# Altium PCB PCB1.PcbDoc
Units mm, origin at the board's own origin, x right, y up, seen from the top; angles counter-clockwise.
Board outline 46.8 x 37.5 mm, 2 copper layers (Top Layer, Bottom Layer), stack 1.671 mm thick; 34 components, 12 nets, 75 pads, 42 vias.
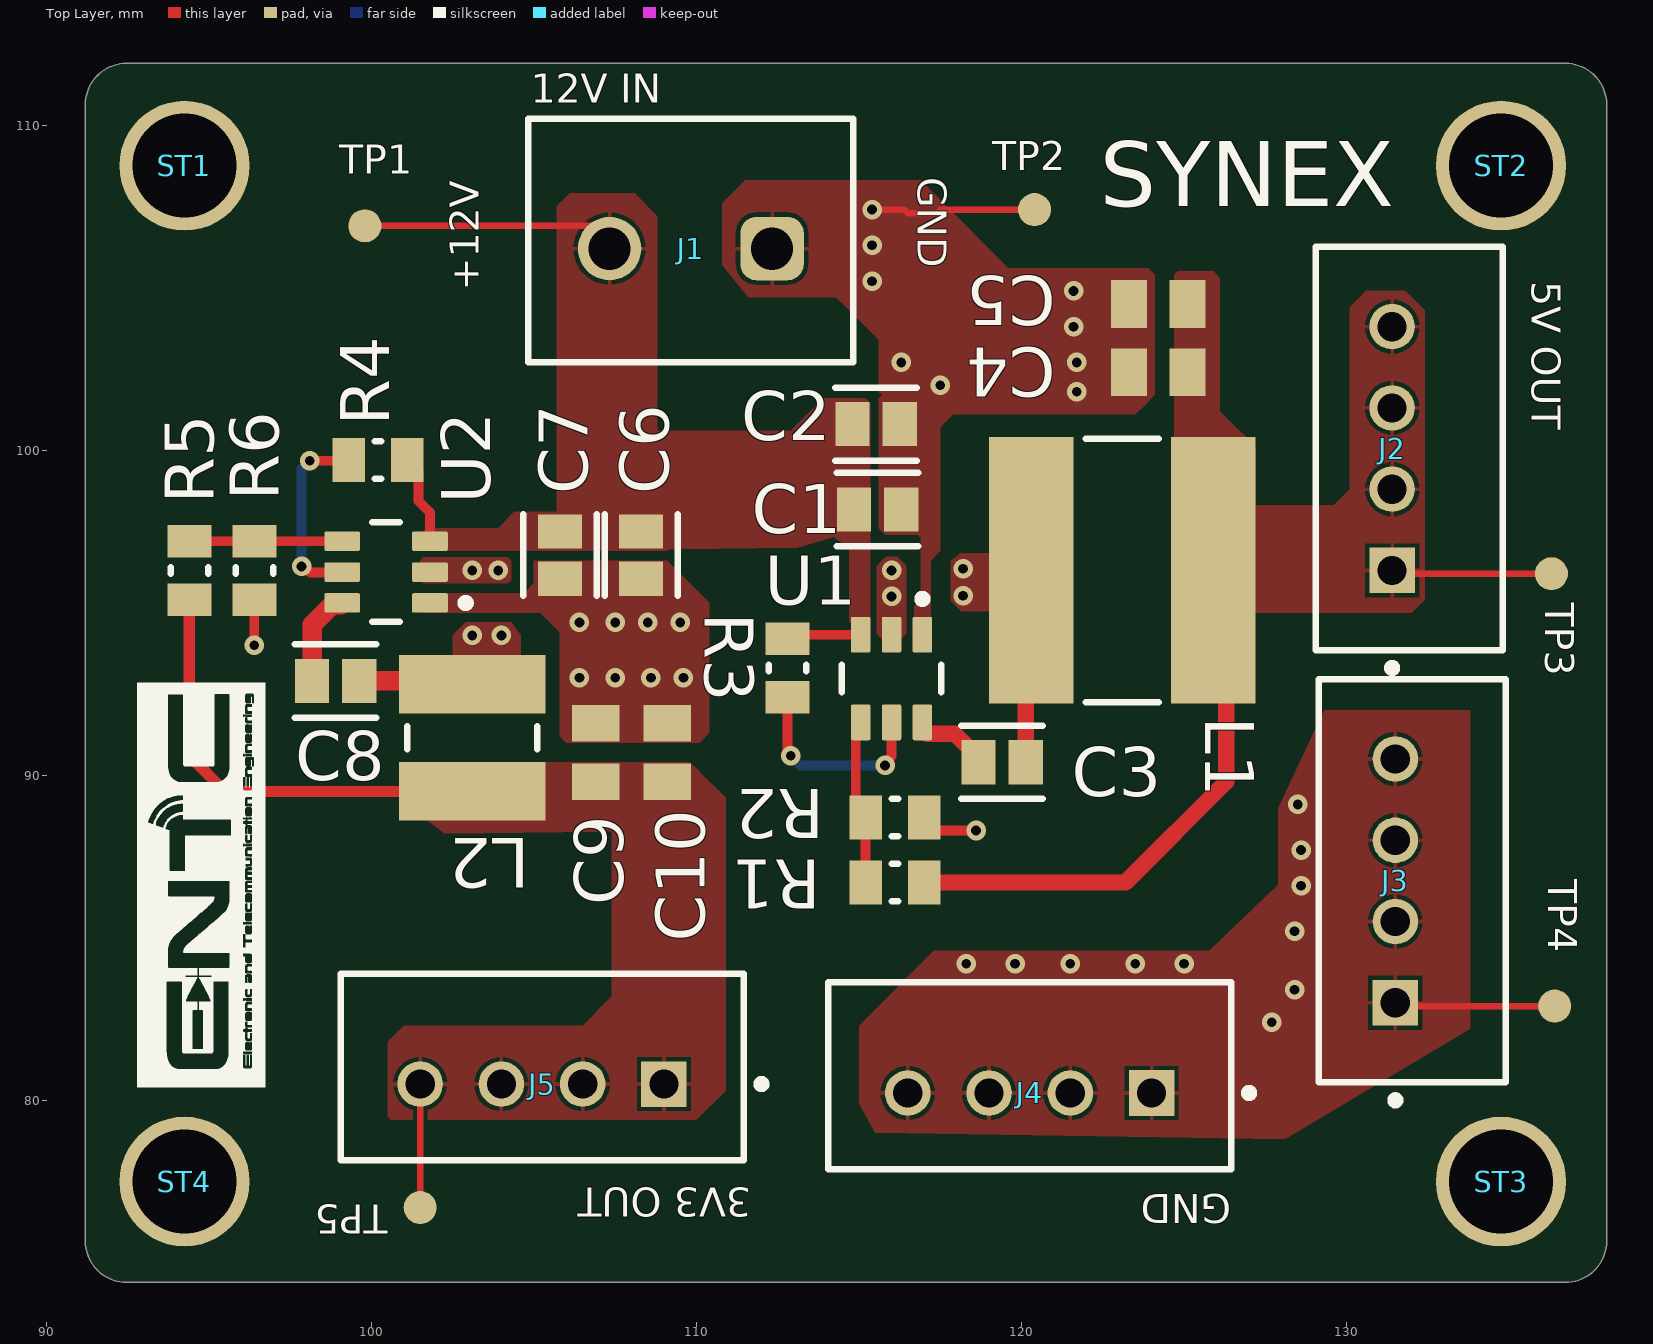
[diagram p0: Top Layer view]
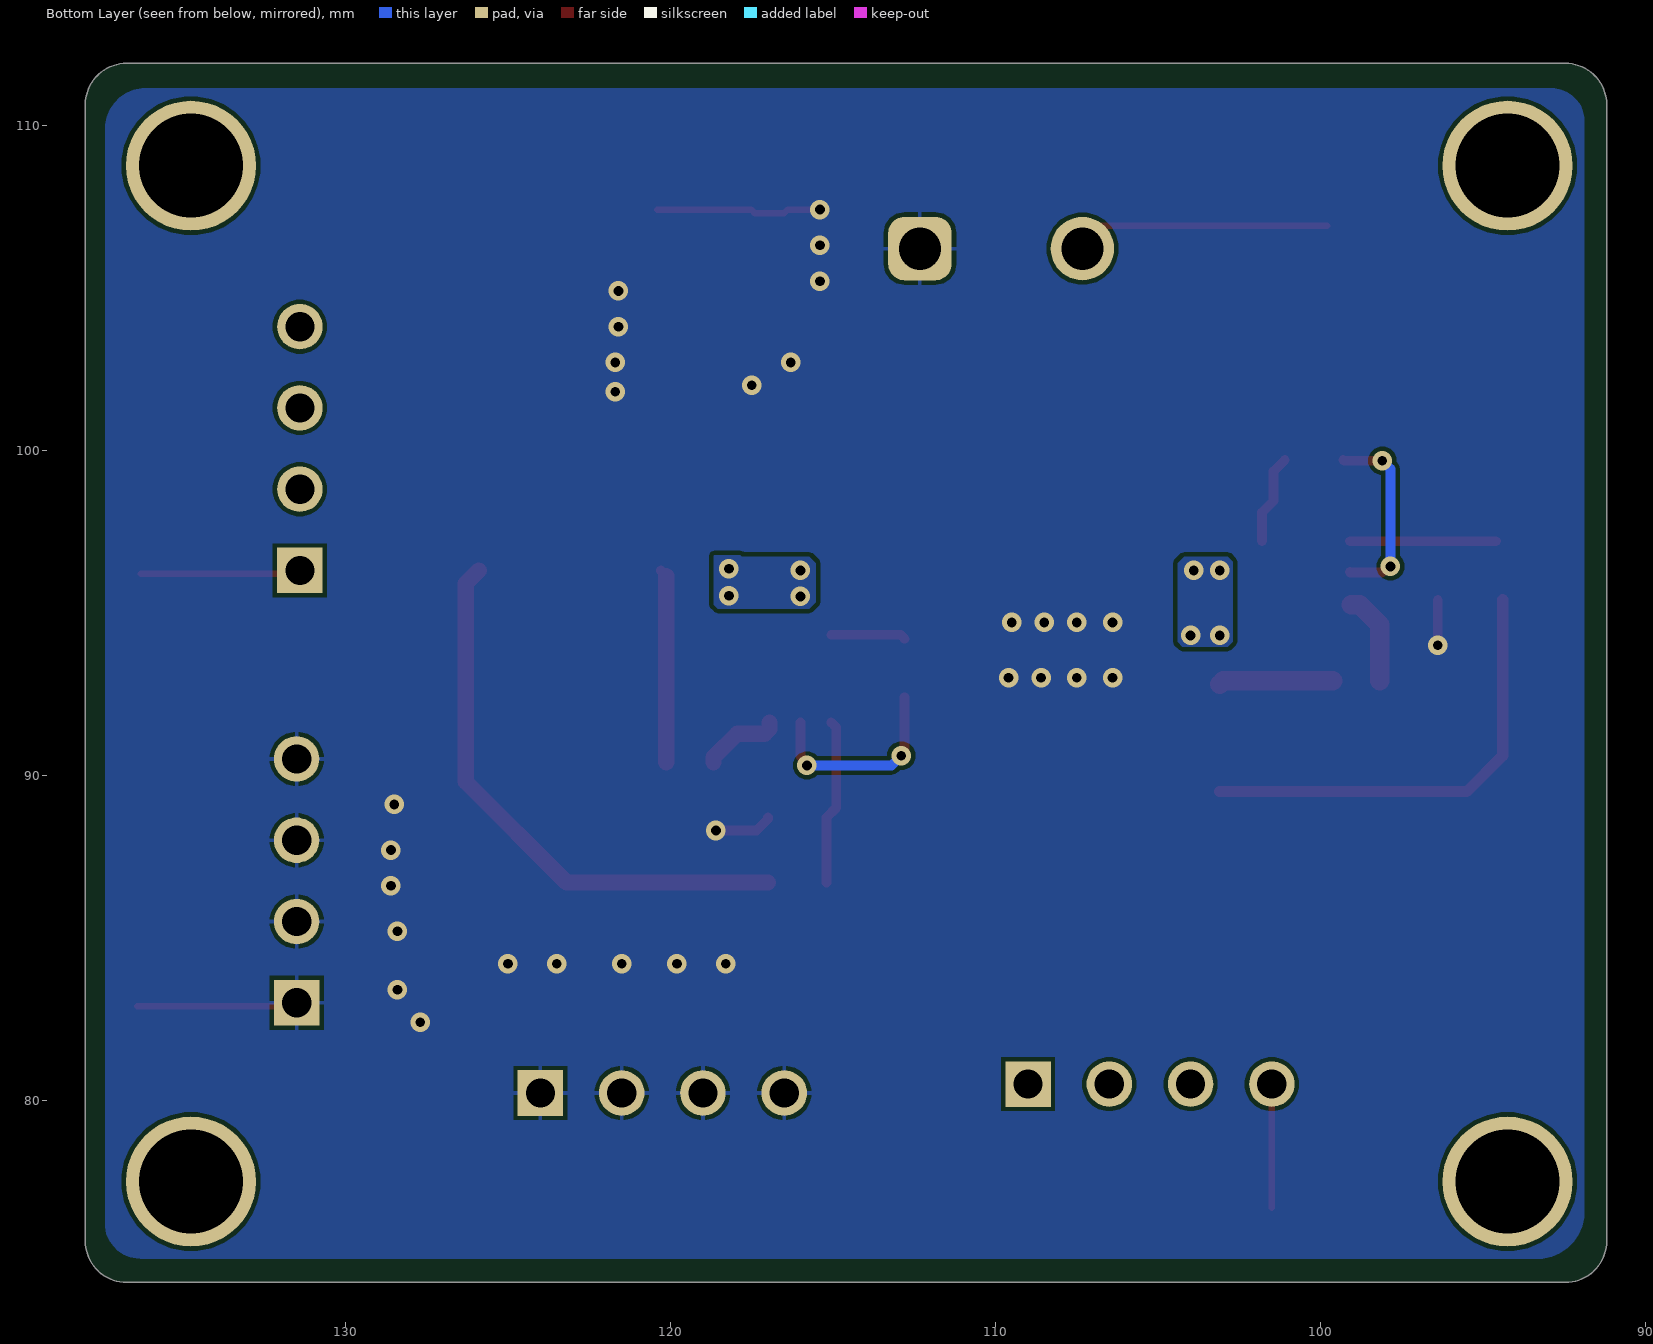
[diagram p1: Bottom Layer view, seen from below]
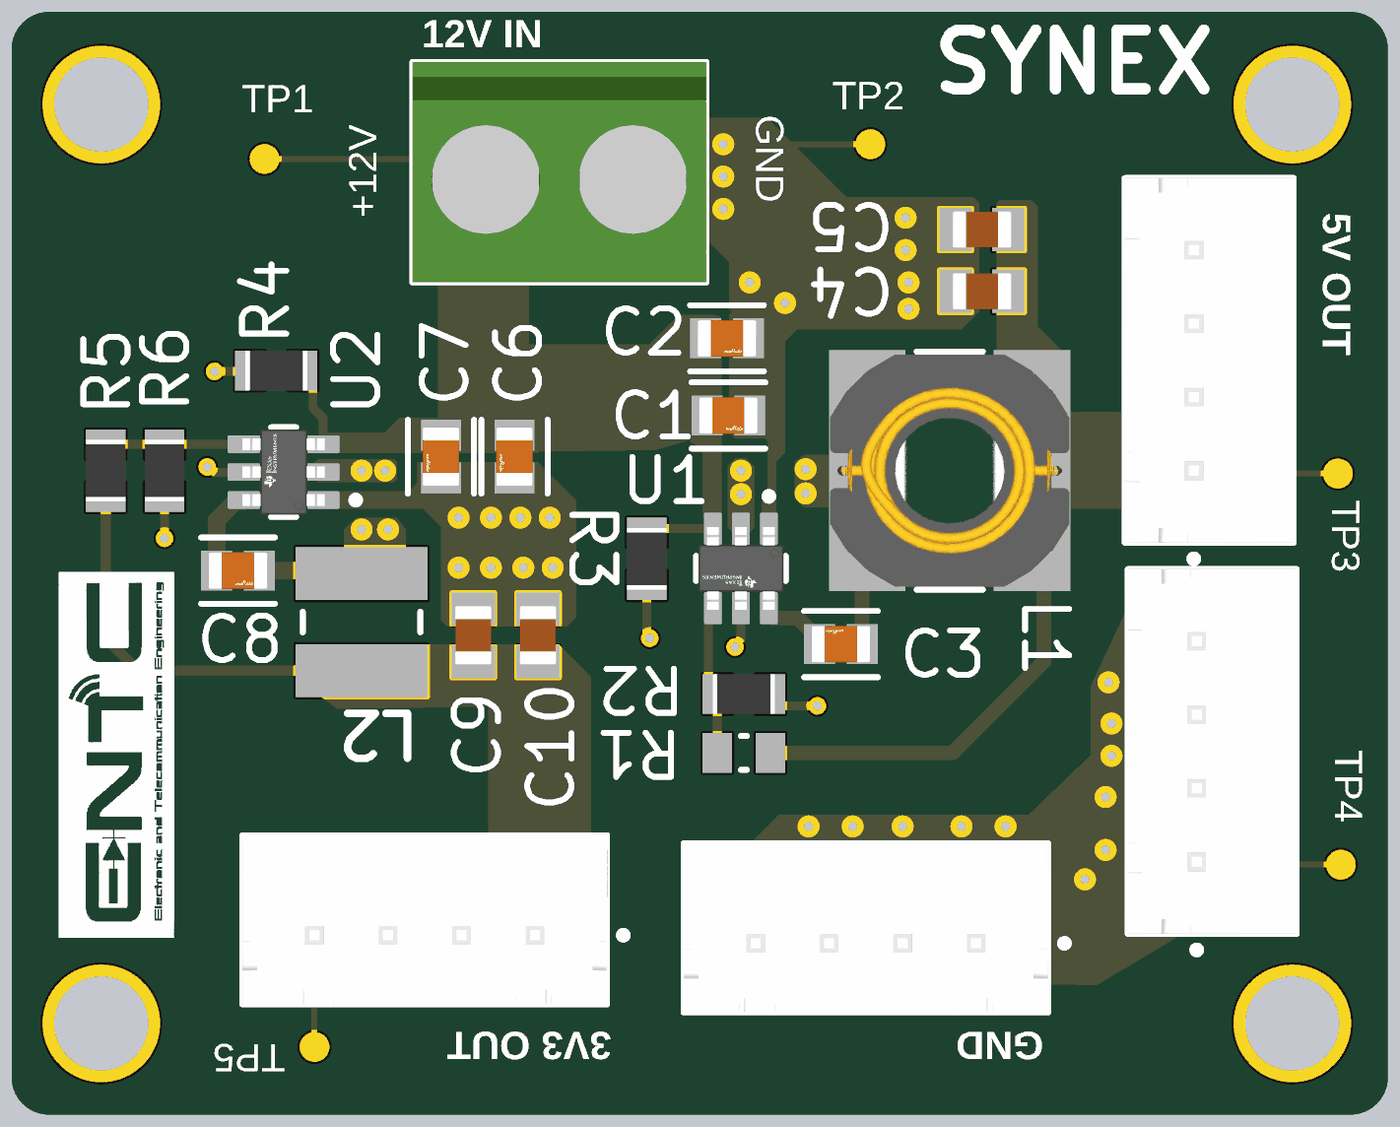
[diagram p2: 3D render of the assembled board from above, using the file's embedded part models]

## Layer stack, top to bottom
Top Solder: solder mask 0.0102, Solder Resist, Dk 3.5
Top Layer: signal copper 0.0356
Dielectric 1: dielectric 1.6, FR-4, Dk 4.8
Bottom Layer: signal copper 0.0356
Bottom Solder: solder mask 0.0102, Solder Resist, Dk 3.5

## Board outline
91.2,75.67 ccw(c92.47,75.67) 92.47,74.4 136.73,74.4 ccw(c136.73,75.67) 138,75.67 138,110.63 ccw(c136.73,110.63) 136.73,111.9 92.47,111.9 ccw(c92.47,110.63) 91.2,110.63

## Design rules (kind name [scope] priority, off if disabled: settings)
BoardOutlineClearance [All] p1: gap=0.2 ignorepadtopadclearanceinfootprint=FALSE
Clearance [All] p1: gap=0.127 ignorepadtopadclearanceinfootprint=FALSE except(0.25: Arc-Hole Track-Hole SMDPad-Hole THPad-Hole Via-Hole Fill-Hole Poly-Hole Region-Hole Text-Hole)
ComponentClearance [All] p1: gap=0.127 collisioncheckmode=3 verticalgap=0.127 showdistances=TRUE
DiffPairsRouting [All] p1: maxlimit=0.254 minlimit=0.127 mostfreqgap=0.127 toplayer_minwidth=0.127 toplayer_maxwidth=25.4 toplayer_prefwidth=0.127 bottomlayer_minwidth=0.127 bottomlayer_maxwidth=25.4 bottomlayer_prefwidth=0.127 maxuncoupledlength=12.7
Height [All] p1: minheight=0 maxheight=1816.048 prefheight=12.7
HoleSize [All] p1: absolutevalues=TRUE maxlimit=6.3 minlimit=0.3 maxpercent=80.000 minpercent=20.000
HoleToHoleClearance [All] p1: gap=0.25 allowstackedmicrovias=FALSE
MinimumAnnularRing [All] p1: minimumring=0.076
MinimumSolderMaskSliver [All] p1: minsoldermaskwidth=0
PlaneClearance [All] p1: clearance=0.127
PlaneConnect PlaneConnectPowerPads [InPadClass('PowerPads')] p1: planeconnectstyle=Direct reliefexpansion=0.508 reliefentries=4 reliefconductorwidth=0.254 reliefairgap=0.254
PlaneConnect [All] p2: pad.planeconnectstyle=Relief pad.reliefexpansion=0.3 pad.reliefentries=4 pad.reliefconductorwidth=0.127 pad.reliefairgap=0.127 via.planeconnectstyle=Direct via.reliefexpansion=0.3 via.reliefentries=4 via.reliefconductorwidth=0.127 via.reliefairgap=0.127
PolygonConnect PolygonConnectPowerPads [All vs (InPadClass('PowerPads'))] p1: connectstyle=Direct reliefconductorwidth=0.254 reliefentries=4 polygonreliefangle="90 Angle" airgapwidth=0.254
PolygonConnect [All] p2: thpad.connectstyle=Relief thpad.reliefconductorwidth=0.127 thpad.reliefentries=4 thpad.polygonreliefangle="90 Angle" thpad.airgapwidth=0.127 smdpad.connectstyle=Direct smdpad.reliefconductorwidth=0.127 smdpad.reliefentries=4 smdpad.polygonreliefangle="90 Angle" smdpad.airgapwidth=0.127 via.connectstyle=Direct via.reliefconductorwidth=0.127 via.reliefentries=4 via.polygonreliefangle="90 Angle" via.airgapwidth=0.127
RoutingVias [All] p1: holewidth=0.3 width=0.6 viastyle="Through Hole" minholewidth=0.3 minwidth=0.6 maxholewidth=0.6 maxwidth=6.6
SilkToSilkClearance [All] p1: silktosilkclearance=0
SilkToSolderMaskClearance [IsPad] p1: minsilkscreentomaskgap=0.127 clearancetoexposedcopper=TRUE
SolderMaskExpansion [All] p1: expansion=0.075 istentingtop=FALSE
SupplyNets "Schematic Supply Nets_1" [InNet('VIN_12V')] p1: voltage=0.000
SupplyNets "Schematic Supply Nets" [InNet('GND')] p2: voltage=0.000
Width [All] p1: maxlimit=25.4 minlimit=0.127 preferedwidth=0.127 minimp=50.000000 maximp=50.000000 favimp=50.000000
20 further rules are at their usual default settings.

## Components (designator, comment, footprint, x,y, rotation, side; value= is the part's Value field where it differs from the comment)
C1 "MSAST219LB5106KTNA01E44L" FP-GRM21B-0_2-e0_2_0_7-IPC_C 115.574,98.175 r0 top
C2 "MSAST219LB5106KTNA01E44L" FP-GRM21B-0_2-e0_2_0_7-IPC_C 115.526,100.8 r0 top
C3 "08053C104KAT2A" FP-GRM21B-0_2-e0_2_0_7-IPC_C 119.4,90.4 r180 top
C4 "GRM21BR61A226ME44L" CAPC2012X145N 124.2,102.4 r0 top value="22.0 uF"
C5 "GRM21BR61A226ME44L" CAPC2012X145N 124.2,104.5 r0 top value="22.0 uF"
C6 "MSAST219LB5106KTNA01E44L" FP-GRM21B-0_2-e0_2_0_7-IPC_C 108.3,96.774 r270 top
C7 "MSAST219LB5106KTNA01E44L" FP-GRM21B-0_2-e0_2_0_7-IPC_C 105.8,96.774 r270 top
C8 "08053C104KAT2A" FP-GRM21B-0_2-e0_2_0_7-IPC_C 98.9,92.9 r0 top
C9 "GRM21BR61A226ME44L" CAPC2012X145N 106.9,90.7 r270 top value="22.0 uF"
C10 "GRM21BR61A226ME44L" CAPC2012X145N 109.1,90.7 r270 top value="22.0 uF"
J1 "691137710002" 691137710002 109.827,106.45 r180 top
J2 "B4B-XH-A(LF)(SN)" FP-B4B-XH-A_LF_SN-MFG 131.925,100.05 r270 top
J3 "B4B-XH-A(LF)(SN)" FP-B4B-XH-A_LF_SN-MFG 132.025,86.75 r270 top
J4 "B4B-XH-A(LF)(SN)" FP-B4B-XH-A_LF_SN-MFG 120.25,80.75 r0 top
J5 "B4B-XH-A(LF)(SN)" FP-B4B-XH-A_LF_SN-MFG 105.25,81.025 r0 top
L1 "SRN8040-3R3Y" FP-SRN8040-MFG 123.1,96.3 r0 top
L2 "SDR0403-3R3ML" BOUR-SDR0403-2_V 103.1,91.15 r270 top
R1 "RC0805FR-0756K2L" RESC2013X60X35NL10T20 116.1,86.7 r0 top value="56.2 Kohm"
R2 "RC0805FR-0710KL" RESC2013X60X35NL10T20 116.1,88.7 r180 top
R3 "RC0805FR-0710KL" RESC2013X60X35NL10T20 112.8,93.3 r270 top
R4 "RC0805FR-0710KL" RESC2013X60X35NL10T20 100.2,99.7 r180 top
R5 "CRCW080533K2FKEA" RESC2013X60X35NL10T20 94.4,96.3 r270 top
R6 "RC0805FR-0710KL" RESC2013X60X35NL10T20 96.4,96.3 r90 top
ST1 "PTH" "Copy of PTH-M2D5X5" 94.25,108.75 r0 top
ST2 "PTH" "Copy of PTH-M2D5X5" 134.75,108.75 r0 top
ST3 "PTH" "Copy of PTH-M2D5X5" 134.75,77.5 r0 top
ST4 "PTH" "Copy of PTH-M2D5X5" 94.25,77.5 r0 top
TP1 "TPAD6R" TP06R 99.8,106.9 r0 top
TP2 "TPAD6R" TP06R 120.4,107.4 r0 top
TP3 "TPAD6R" TP06R 136.3,96.2 r0 top
TP4 "TPAD6R" TP06R 136.4,82.9 r0 top
TP5 "TPAD6R" TP06R 101.5,76.7 r0 top
U1 "TPS563200DDCR" FP-DDC0006A-MFG 116,92.975 r270 top
U2 "TPS561208DDCR" FP-DDC0006A-MFG 100.45,96.25 r180 top

## Footprints (in the part's own frame and the unit in brackets; to place one, negate y for a bottom-side part, rotate by r counter-clockwise, add the part's x,y. Pads: shape width x height; smd on the part's side, far side on the other; paste and mask are expansions set on the pad)
691137710002 [mm] "Horizontal Cable Entry with Pressure Clamp, pitch 5mm, 02p"
  rrect50% 1.95x1.95 hole 1.3: 1(-2.5,0.25)
  round 1.95 hole 1.3: 2(2.5,0.25)
  silkscreen extent -5,-3.75 5,3.75, body extent -5,-3.75 5,3.75, height 11.6
BOUR-SDR0403-2_V [mm] "SMD, 2-Leads, Dia 4.5mm, Height 3.5mm"
  rect 1.8x4.5 smd: 1(-1.65,0) 2(1.65,0)
  silkscreen extent -0.35,-2 0.35,2, body extent -2.25,-2 2.25,2, height 3.5
CAPC2012X145N [mm]
  rect 1.11x1.47 smd: 1(-0.9,0) 2(0.9,0)
  body extent -1,-0.63 1,0.63, height 1.45
"Copy of PTH-M2D5X5" [mm]
  round 4 hole 3.2: 1(0,0)
FP-B4B-XH-A_LF_SN-MFG [mm]
  rect 1.4x1.4 hole 0.9 paste-2539.97 mask+0: 1(3.75,-0.525)
  round 1.4 hole 0.9 paste-2539.97 mask+0: 2(1.25,-0.525) 3(-1.25,-0.525) 4(-3.75,-0.525)
  silkscreen extent -6.2,-2.88 6.87,2.88, body extent -6.3,-2.98 6.3,2.98, height 0.25
FP-DDC0006A-MFG [mm]
  rrect17% 1.1x0.6 smd paste+0 mask+0: 1(-1.35,0.95) 2(-1.35,0) 3(-1.35,-0.95) 4(1.35,-0.95) 5(1.35,0) 6(1.35,0.95)
  silkscreen extent -2.57,-1.53 0.42,1.53, body extent -2,-1.63 2,1.63, height 0.25
FP-GRM21B-0_2-e0_2_0_7-IPC_C [mm]
  rect 1.055x1.356 smd paste+0 mask+0: 1(-0.726,0) 2(0.726,0)
  silkscreen extent -1.25,-1.12 1.25,1.12, body extent -1.35,-0.82 1.35,0.82, height 0.25
FP-SRN8040-MFG [mm]
  rect 2.6x8.2 smd paste+0 mask+0: 1(-2.8,0) 2(2.8,0)
  silkscreen extent -1.12,-4.05 1.12,4.05, body extent -4.28,-4.2 4.28,4.2, height 0.25
RESC2013X60X35NL10T20 [mm] "Chip Resistor, 2-Leads, Body 2.00x1.25mm, IPC Medium Density"
  rect 1x1.35 smd: 1(-0.9,0) 2(0.9,0)
  silkscreen extent -0.1,-0.58 0.1,0.58, body extent -1.05,-0.67 1.05,0.67, height 0.6
TP06R [mil] "Testpoint, round, d=0.6mm"
  round 40 smd paste-39.37: 1(0,0)

## Part data
C1 C2 C6 C7: library part CMP-06035-039918-1, "MSAST219LB5106KTNA01", Capacitance="10.0 uF", Case Code (Imperial)=0805, Case Code (Metric)=2012, Dielectric=X5R, Dielectric Material=Ceramic, Max Operating Temperature=85°C, Min Operating Temperature=-55°C, Package Quantity=3000, Tolerance=20%, Voltage=10V, Case/Package=0805, Depth=1.25mm, Dissipation Factor=0.035%, Height=1.25mm, Lead Free="Lead Free", Length=2mm, Mount="Surface Mount", Packaging="Tape and Reel", Resistor Type=Ceramic, Termination=SMD/SMT, Thickness=0.057inch, Voltage Rating=10V, Voltage Rating (DC)=10V, Weight=0.000335oz, Width=1.25mm
C3 C8: library part CMP-06035-039918-1, Capacitance="100.0 nF", Case Code (Imperial)=0805, Case Code (Metric)=2012, Dielectric=X5R, Dielectric Material=Ceramic, Max Operating Temperature=85°C, Min Operating Temperature=-55°C, Package Quantity=3000, Tolerance=20%, Voltage=10V, Case/Package=0805, Depth=1.25mm, Dissipation Factor=0.035%, Height=1.25mm, Lead Free="Lead Free", Length=2mm, Mount="Surface Mount", Packaging="Tape and Reel", Resistor Type=Ceramic, Termination=SMD/SMT, Thickness=0.057inch, Voltage Rating=10V, Voltage Rating (DC)=10V, Weight=0.000335oz, Width=1.25mm
C4 C5 C9 C10: "SMD capacitor X5R(EIA) with capacitance 22uF Tol.20%. Rated voltage 10Vdc 85C", Package="2012 Murata", Check_prices=https://www.snapeda.com/parts/GRM21BR61A226ME44L/Murata+Electronics+North+America/view-part/?ref=eda, MF="Murata Electronics", MP=GRM21BR61A226ME44L, SnapEDA_Link=https://www.snapeda.com/parts/GRM21BR61A226ME44L/Murata+Electronics+North+America/view-part/?ref=snap
J1: library part CMP-1502-03324-3, "Terminal Block, 5MM Pitch, Horizontal, Pressure Clamp Glow Wire, Pcb, 2PINS, Gr", Current Rating=16A, Max Operating Temperature=120°C, Min Operating Temperature=-30°C, Voltage Rating=300V, Contact Material="Nickel, Tin", Height=11.6mm, Lead Pitch=5mm, Number of Contacts=2, Number of Pins=2, Number of Rows=1, Packaging=Box, RoHS=Compliant
J2 J3 J4 J5: library part CMP-17439-000250-1, "CONN HEADER VERT 4POS 2.5MM", Color=Natural, Contact Resistance=20mR, Current Rating=3A, Flammability Rating="UL94 V-0", Housing Color=White, Insulation Resistance=1GR, Max Operating Temperature=85°C, Max Voltage Rating (AC)=250V, Min Operating Temperature=-25°C, Package Quantity=500, Connector Type=Header, Contact Finish - Mating=TIN, Contact Material=Brass, Contact Plating=Tin, Contact Shape=Square, Contact Type="Male Pin", Depth=5.75mm, Fastening Type=Detent, Gender=Male, Housing Material=Polyamide, Insulation Color=Natural, Insulation Material=Nylon, Lead Free="Lead Free", Lead Pitch=2.5mm, Length=12.4mm, Mated Stacking Heights=9.8mm, Material=Polyamide, Max Current Rating=3A, Max Voltage Rating (DC)=250V, Mount="Through Hole", Number of Contacts=4, Number of Positions=4, Number of Rows=1, Orientation=Straight, Packaging=Bulk, Pitch=2.5mm, REACH SVHC="No SVHC", Series=XH, Termination=Solder, Voltage Rating=250V, Voltage Rating (AC)=250V, Wire/Cable Gauge=22AWG
L1: library part CMP-07248-000074-1, "FIXED IND 3.3UH 5.6A 21 MOHM SMD", Case/Package=Nonstandard, Current Rating=5.6A, DC Resistance (DCR)=21mR, Inductance="3.3 uH", Inductance Tolerance=30%, Max Operating Temperature=125°C, Min Operating Temperature=-40°C, Package Quantity=1000, Resistor Type=Wirewound, Saturation Current=5.5A, Self Resonant Frequency=34MHz, Test Frequency=100kHz, Core Material=Ferrite, DC Current=5.6A, Depth=8.3mm, Height=4mm, Height - Seated (Max)=0.157inch, Length=8mm, Material=Steel, Max DC Current=5.6A, Military Standard=Not, Mount="Surface Mount", Number of Pins=2, Packaging="Tape and Reel", REACH SVHC="No SVHC", RMS Current (Irms)=5.6A, RoHS Compliant=Yes, Sample Rate (Hz)=100kHz, Series=SRN8040, Shielding=Shielded, Termination=SMD/SMT, Tolerance=30%, Width=8mm
L2: library part CMP-0904-00015-1, "SDR0403 Series Power Inductor, 3.3 uF +/- 20 %, 0.058 Ohm, -40 to 125 degC, 2-Pin SMD, RoHS, Tape and Reel", Inductance (uH)="3.3 uH", Manufacturer=Bourns, Temperature Range="-40 to 125 degC", Test Frequency (MHz)=7.96, Tolerance (%)="+/- 20", ComponentLink1Description="Manufacturer URL", ComponentLink1URL=http://www.bourns.com/, ComponentLink2Description=Datasheet, ComponentLink2URL=http://www.bourns.com/data/global/pdfs/sdr0403.pdf, DatasheetVersion=Feb-12, I rms (A)="2.15 Max.", I sat (A)="3 Typ.", Mounting Technology="Surface Mount", PackageDescription="3-Pin SMD, Dia 4.5 mm, Height 3.5 mm", PackageReference=SDR0403-2, Packing="Tape and Reel", PartNumber=SDR0403-3R3ML, Q=28, RDC (Ohm)="0.058 Max.", RoHS=TRUE, SRF (MHz)="65 Min."
R1: library part CMP-2001-01197-1, Manufacturer=Yageo, Part Number=RC0805FR-0756K2L
R2 R3 R4 R6: library part CMP-1659-00013-4, "Chip Resistor, 10 KOhm, +/- 1%, 0.125 W, -55 to 155 degC, 0805 (2012 Metric), RoHS, Tape and Reel", Manufacturer=Yageo, Max Operating Temperature="155 degC", Min Operating Temperature="-55 degC", Package Quantity=5000, Voltage Rating="150 V", ComponentLink1Description="Manufacturer URL", ComponentLink1URL=http://www.yageo.com/, ComponentLink2Description=Datasheet, ComponentLink2URL=http://www.yageo.com/documents/recent/PYu-RC_Group_51_RoHS_L_04.pdf, DatasheetVersion="Rev. 4, 02/2016", Height="0.5 mm", Length="2 mm", Mount="Surface Mount", Mounting Technology="Surface Mount", PackageDescription="2-Pin Surface Mounted Device, Body 2 x 1.25 mm", PackageReference=0805, Packaging="Tape and Reel", Pins=2, REACH SVHC="No SVHC", RoHSCompliant=true
R5: library part CMP-1659-00013-4, "RES Thick Film, 33.2kΩ, 1%, 0.125W, 100ppm/°C, 0805", Manufacturer=Yageo, Max Operating Temperature="155 degC", Min Operating Temperature="-55 degC", Package Quantity=5000, Voltage Rating="150 V", ComponentLink1Description="Manufacturer URL", ComponentLink1URL=http://www.yageo.com/, ComponentLink2Description=Datasheet, ComponentLink2URL=http://www.yageo.com/documents/recent/PYu-RC_Group_51_RoHS_L_04.pdf, DatasheetVersion="Rev. 4, 02/2016", Height="0.5 mm", Length="2 mm", Mount="Surface Mount", Mounting Technology="Surface Mount", PackageDescription="2-Pin Surface Mounted Device, Body 2 x 1.25 mm", PackageReference=0805, Packaging="Tape and Reel", Pins=2, REACH SVHC="No SVHC", RoHSCompliant=true
ST1 ST2 ST3 ST4: library part CMP-00028-00010-1, "4mm, 3.2mm", Pins=1
TP1 TP2 TP3 TP4 TP5: library part CMP-00028-00002-3, "0.6mm round", Pins=1
U1: library part CMP-04918-000155-1, "IC REG BUCK ADJ 3A TSOT23-6", Case/Package=SOT-23-6, Max Input Voltage=17V, Max Operating Temperature=125°C, Max Output Current=3A, Max Output Voltage=7V, Min Input Voltage=4.5V, Min Operating Temperature=-40°C, Min Output Voltage=760mV, Quiescent Current=190uA, Switching Frequency=650kHz, Contact Plating=Tin, Lead Free="Lead Free", Mount="Surface Mount", Number of Outputs=1, Operating Supply Voltage=17V, Output Configuration=Positive, Output Current=3A, Output Type=Adjustable, Output Voltage=7V, Packaging="Tape and Reel", Radiation Hardening=No, Synchronous Rectifier=Yes
U2: library part CMP-04918-000155-1, "4.5V to 17V Input, 1A Output, Synchronous Step-Down Converter 6-SOT-23-THIN -40 to 125", Case/Package=SOT-23-6, Max Input Voltage=17V, Max Operating Temperature=125°C, Max Output Current=3A, Max Output Voltage=7V, Min Input Voltage=4.5V, Min Operating Temperature=-40°C, Min Output Voltage=760mV, Quiescent Current=190uA, Switching Frequency=650kHz, Contact Plating=Tin, Lead Free="Lead Free", Mount="Surface Mount", Number of Outputs=1, Operating Supply Voltage=17V, Output Configuration=Positive, Output Current=3A, Output Type=Adjustable, Output Voltage=7V, Packaging="Tape and Reel", Radiation Hardening=No, Synchronous Rectifier=Yes

## Via types
v1: diameter 0.6, hole 0.3, Top Layer to Bottom Layer, 42 vias

## Nets (pads, with @x,y where several pads share a name; then routed paths per layer and width w, separated by ;. In a path a pad name is that pad's centre, name@x,y a point inside that pad or via, vN(x,y) a via of type N, cw(c..) or ccw(c..) an arc to the next point about the centre after c; other vN are vias at no path point)
EN3.3: R4.2 U2.5 | length 5.9
  Top Layer w0.3: v1(97.85,96.425) 97.931,96.425 98.119,96.237 99.088,96.237 U2.5 ; v1(98.1,99.675) 99.275,99.675 R4.2
  Bottom Layer w0.3: v1(97.85,96.425) 97.85,99.425 v1(98.1,99.675)
EN5: R3.2 U1.5 | length 6.3
  Top Layer w0.3: R3.2 112.8,90.781 112.9,90.681 v1(112.9,90.6) ; v1(115.8,90.3) 115.8,90.381 116,90.581 U1.5
  Bottom Layer w0.3: v1(112.9,90.6) 113.2,90.3 v1(115.8,90.3)
GND: C1.2 C2.2 C4.1 C5.1 C6.2 C7.2 C9.1 C10.1 J1.1 J3.1 J3.2 J3.3 J3.4 J4.1 J4.2 J4.3 J4.4 R2.1 R6.1 TP2.1 TP4.1 U1.1 U2.1 | length 13.2
  Top Layer w0.2: v1(115.4,107.4) 116.396,107.4 116.513,107.283 117.4,107.283 117.517,107.4 TP2.1 ; J3.1 131.6,82.9 TP4.1
  Top Layer w0.3: v1(96.4,94) R6.1 ; R2.1 117,88.65 117.35,88.3 v1(118.6,88.3)
  other v1: 127.7,82.4 128.4,83.4 118.3,84.2 119.8,84.2 121.5,84.2 123.5,84.2 125,84.2 128.4,85.2 128.6,86.6 128.6,87.7 128.5,89.1 106.4,93 107.5,93 108.6,93 109.6,93 106.4,94.7 107.5,94.7 108.5,94.7 109.5,94.7 121.7,101.8 117.5,102 116.3,102.7 121.7,102.7 121.6,103.8 121.6,104.9 115.4,105.2 115.4,106.3
SW3.3: C8.2 L2.1 U2.2 | length 3.5
  Top Layer w0.6: C8.2 103,92.9 L2.1
  other v1: 103.1,94.3 104,94.3 103.1,96.3 103.9,96.3
SW5: C3.1 L1.1 U1.2 | length 6
  Top Layer w0.3: L1.1@120.126,96.126 L1.1
  Top Layer w0.5: C3.1 L1.1@120.126,96.126
  other v1: 116,95.5 118.2,95.525 116,96.3 118.2,96.35
VBST3.3: C8.1 U2.6 | length 2.9
  Top Layer w0.6: C8.1 98.174,94.624 98.8,95.25 U2.6@99.051,95.25
VBST5: C3.2 U1.6 | length 2.4
  Top Layer w0.5: U1.6 116.95,91.426 117.1,91.276 117.949,91.276 118.674,90.551 C3.2
VFB3.3: R5.1 R6.2 U2.4 | length 4.5
  Top Layer w0.3: R5.1@94.6,97.2 96.6,97.2 U2.4
VFB5: R1.1 R2.2 U1.4 | length 5.1
  Top Layer w0.3: U1.4 114.9,91.475 114.9,89 R2.2 R1.1
VIN_12V: C1.1 C2.1 C6.1 C7.1 J1.2 R3.1 R4.1 TP1.1 U1.3 U2.3 | length 12.5
  Top Layer w0.2: TP1.1 106.825,106.9 J1.2@107.125,106.6
  Top Layer w0.3: R4.1 101.45,99.35 101.45,98.437 101.8,98.088 U2.3 ; R3.1 112.925,94.325 U1.3
VOUT_3V3: C9.2 C10.2 J5.1 J5.2 J5.3 J5.4 L2.2 R5.2 TP5.1 | length 17.8
  Top Layer w0.2: TP5.1 J5.4
  Top Layer w0.35: R5.2 94.4,90.6 95.5,89.5 L2.2
VOUT_5V: C4.2 C5.2 J2.1 J2.2 J2.3 J2.4 L1.2 R1.2 TP3.1 | length 22.2
  Top Layer w0.2: J2.1 131.5,96.2 TP3.1
  Top Layer w0.5: R1.2 123.2,86.7 126.3,89.8 126.3,95.9 L1.2
pads on no net: ST1.1 ST2.1 ST3.1 ST4.1

## Polygon pours and split planes (outlines as drawn)
GND on Top Layer "GND_L01_P049" (solid, pour order 49): 110.797,107.597 111.5,108.3 116.9,108.3 120.15,105.05 117.5,102.4 116.4,102.4 115.6,101.6 115.6,103.4 114.3,104.7 111.6,104.7 110.797,105.7
VIN_12V on Top Layer "VIN_12V_L01_P050" (solid, pour order 50): 105.7,96.9 113.1,97 114.476,97.4 115.2,97.4 115.2,101.549 115.226,101.575 115.2,101.6 113.9,101.6 112.9,100.6 108.8,100.6 108.8,107.2 108.1,107.9 106.1,107.9 105.7,107.5
VOUT_3V3 on Top Layer "VOUT_3V3_L01_P051" (solid, pour order 51): 100.5,79.5 100.6,79.4 110,79.4 110.9,80.3 110.9,89.3 110,90.2 106.3,90.2 106.3,90 105.9,89.6 107.2,88.3 107.4,88.3 107.4,83.2 106.5,82.3 101,82.3 100.5,81.8 101,82.3 100.5,81.8
VOUT_5V on Top Layer "VOUT_5V_L01_P052" (solid, pour order 52): 130.6,104.9 131.8,104.9 132.4,104.3 132.4,95.4 132,95 126.5,95 126.5,96.9 127.2,98.3 129.6,98.3 130.1,98.8 130.1,104.4
VOUT_3V3 on Top Layer "VOUT_3V3_L01_P046" (solid, pour order 46): 109.8,90.4 110.1,90.1 110.1,89.1 109.5,88.3 102.264,88.202 101.7,88.625 101.7,90.4 107,90.4
VOUT_5V on Top Layer "VOUT_5V_L01_P038" (solid, pour order 38): 124.7,103 124.7,105.4 124.8,105.5 125.9,105.5 126.1,105.3 126.1,101.2 127.2,100.1 127.2,96.4 124.6,96.4 124.7,96.5 124.7,103.1
GND on Top Layer "GND_L01_P047" (solid, pour order 47): 115.5,79 128.1,78.8 133.8,82.2 133.8,92 129.306,92 127.9,88.987 127.9,86.63 125.777,84.6 117.3,84.6 115,82.3 115,79.9
SW3.3 on Top Layer "SW3.3_L01_P011" (solid, pour order 11): 101.6,96.7 104.2,96.7 104.3,96.6 104.3,96 104.2,95.9 101.6,95.9 101.5,96 101.5,96.6
SW3.3 on Top Layer "SW3.3_L01_P015" (solid, pour order 15): 102.9,94.5 102.9,94.7 104.3,94.7 104.6,94.3 104.6,92.5 102.5,92.5 102.5,94.3 102.9,94.7
VIN_12V on Top Layer "VIN_12V_L01_P035" (solid, pour order 35): 101.6,96.9 109.1,96.9 109.2,97 109.2,98 109,98.1 108.9,98.1 104.4,98.1 103.9,97.6 101.7,97.6 101.6,97.5
GND on Top Layer "GND_L01_P036" (solid, pour order 36): 101.6,95.6 104.7,95.6 105,95.9 105,96.6 109.1,96.6 110.4,95.3 110.4,91.3 110.1,91 106,91 105.8,91.2 105.8,94.4 105.2,95 101.6,95
SW5 on Top Layer "SW5_L01_P027" (solid, pour order 27): 115.55,94.35 115.7,94.2 116.3,94.2 116.45,94.35 116.45,96.45 116.175,96.725 115.825,96.725 115.55,96.45
SW5 on Top Layer "SW5_L01_P030" (solid, pour order 30): 117.825,95.375 118.15,95.05 120.6,95.05 120.725,95.175 120.725,96.675 120.6,96.8 118.15,96.85 117.825,96.6
VIN_12V on Top Layer "VIN_12V_L01_P033" (solid, pour order 33): 115.351,101.45 115.226,101.575 114.209,101.575 114.176,101.475 114.176,101.375 114.176,97.4 114.326,97.25 114.7,97 114.7,94.725 115.351,94.2
GND on Top Layer "GND_L01_P037" (solid, pour order 37): 116.7,94.3 116.7,95.2 116.9,95.4 116.9,97.3 116.8,97.4 115.8,97.4 115.6,97.6 115.6,101.6 119.6,105.6 122.5,105.6 123.9,105.6 124.1,105.4 124.1,101.7 123.8,101.4 123.5,101.1 117.9,101.1 117.5,100.7 117.5,96.9 117.2,96.6 117.2,94.3
GND on Bottom Layer "GND_L02_P043" (solid, pour order 43): 136.141,111.131 cw(c136.141,109.881) 137.391,109.881 137.391,76.217 cw(c136.305,76.217) 136.305,75.131 93.309,75.131 cw(c93.305,76.545) 91.891,76.545 91.891,110.131 cw(c92.891,110.131) 92.891,111.131 112.805,111.131
SW3.3 on Bottom Layer "SW3.3_L02_P023" (solid, pour order 23): 102.85,96.725 104.2,96.725 104.4,96.525 104.4,94.1 104.25,93.95 102.85,93.95 102.7,94.1 102.7,96.575
SW5 on Bottom Layer "SW5_L02_P025" (solid, pour order 25): 115.725,95.125 115.525,95.325 115.525,96.525 115.725,96.725 117.8,96.725 117.85,96.775 118.65,96.775 118.675,96.75 118.675,95.25 118.575,95.15 118.55,95.125 115.8,95.125

## Silkscreen, mask and mechanical layers (free items; w line width, h text height)
Top Overlay:
  region: 5 vertices and 48 holes, not listed, extent 92.802,80.406 96.735,92.852
  text "12V IN" at 104.9,110.4 h1.52
  text "GND" at 116.516,108.4 h1.52 r270
  text "SYNEX" at 122.4,107.5 h2
  text "5V OUT" at 135.4,105.193 h1.52 r270
  text "+12V" at 103.6,104.9 h1.52 r90
  text "3V3 OUT" at 111.693,77.6 h1.52 r180
  text "GND" at 126.446,77.4 h1.52 r180
Mechanical 1:
  lines w0.254: 91.2,75.67 ccw(c92.47,75.67) 92.47,74.4 136.73,74.4 ccw(c136.73,75.67) 138,75.67 138,110.71 ccw(c136.81,110.71) 136.81,111.9 113.7,111.9 108.393,111.9 97.778,111.9 92.47,111.9 ccw(c92.47,110.63) 91.2,110.63 91.2,75.67